# Altium PCB CAN Logger 3a HP3561 PCB.PcbDoc (part 1 of 2)
Units mil, origin at the board's own origin, x right, y up, seen from the top; angles counter-clockwise.
Board outline 2229 x 3254 mil, 4 copper layers (Component Side, Signal Layer 2, Signal Layer 1, Solder Side), stack 33.234 mil thick; 82 components, 94 nets, 403 pads, 304 vias.
Unrouted connection lines stored in the file: 3.
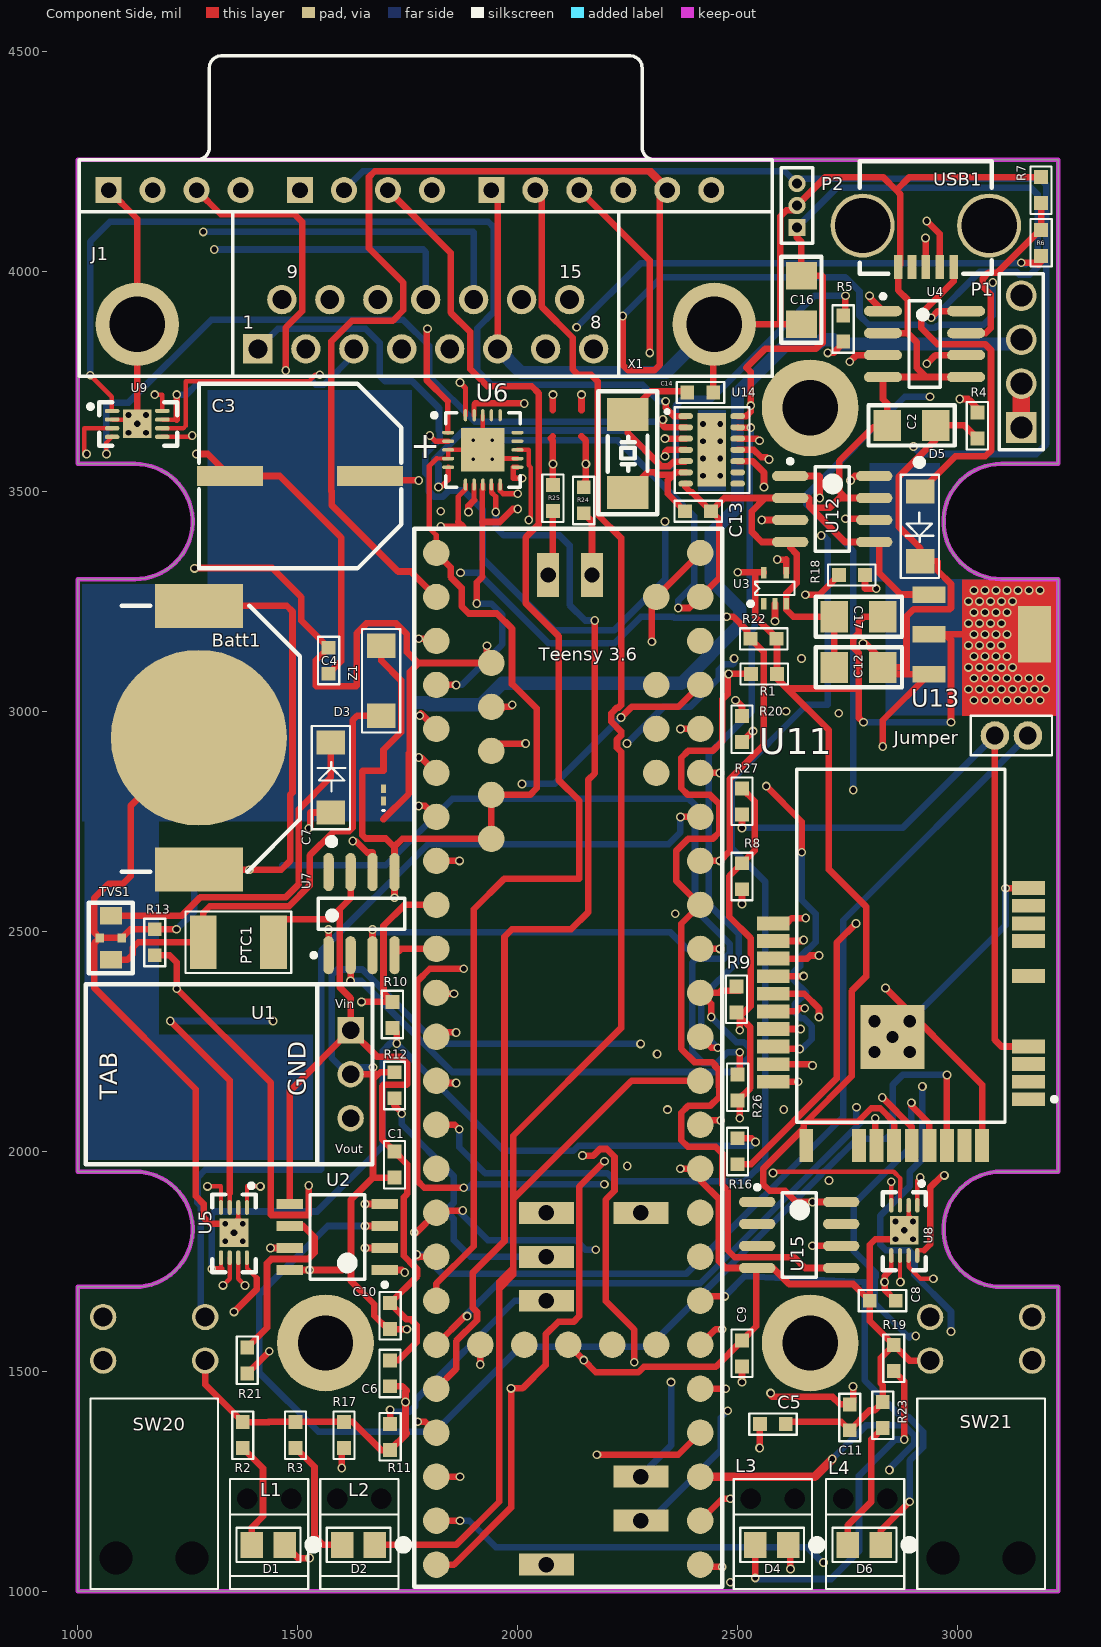
[diagram p0: Component Side view]
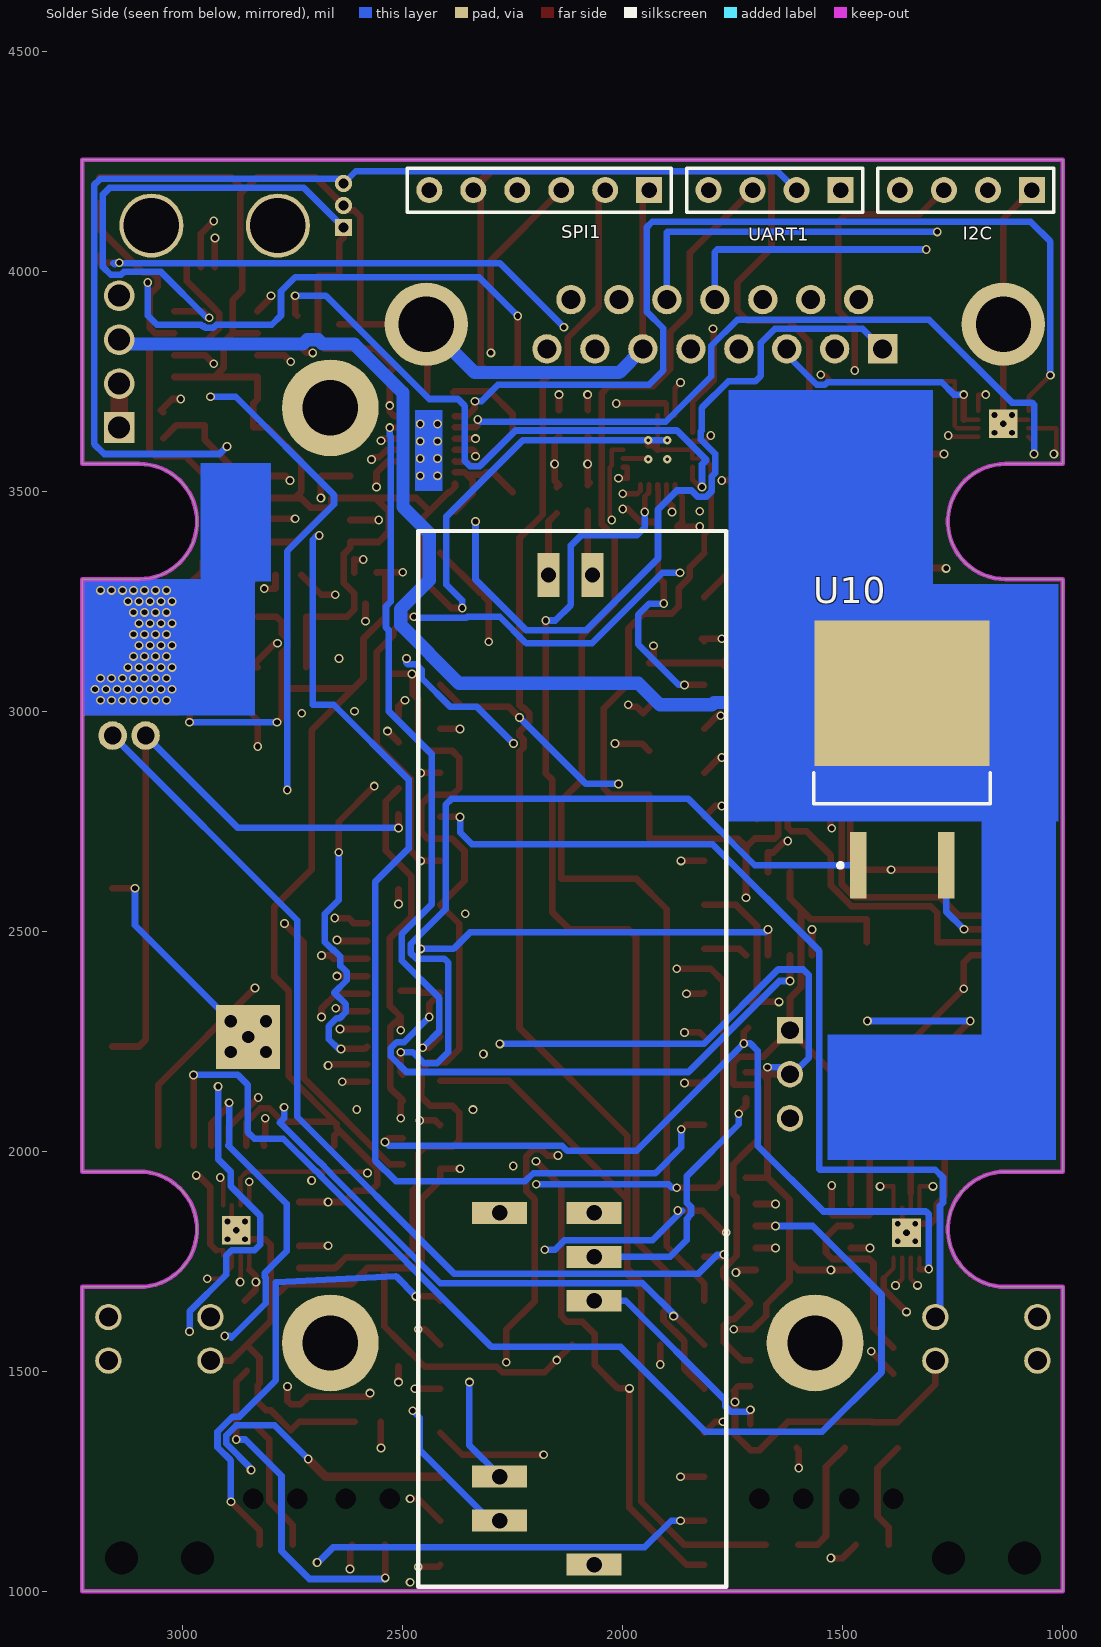
[diagram p1: Solder Side view, seen from below]
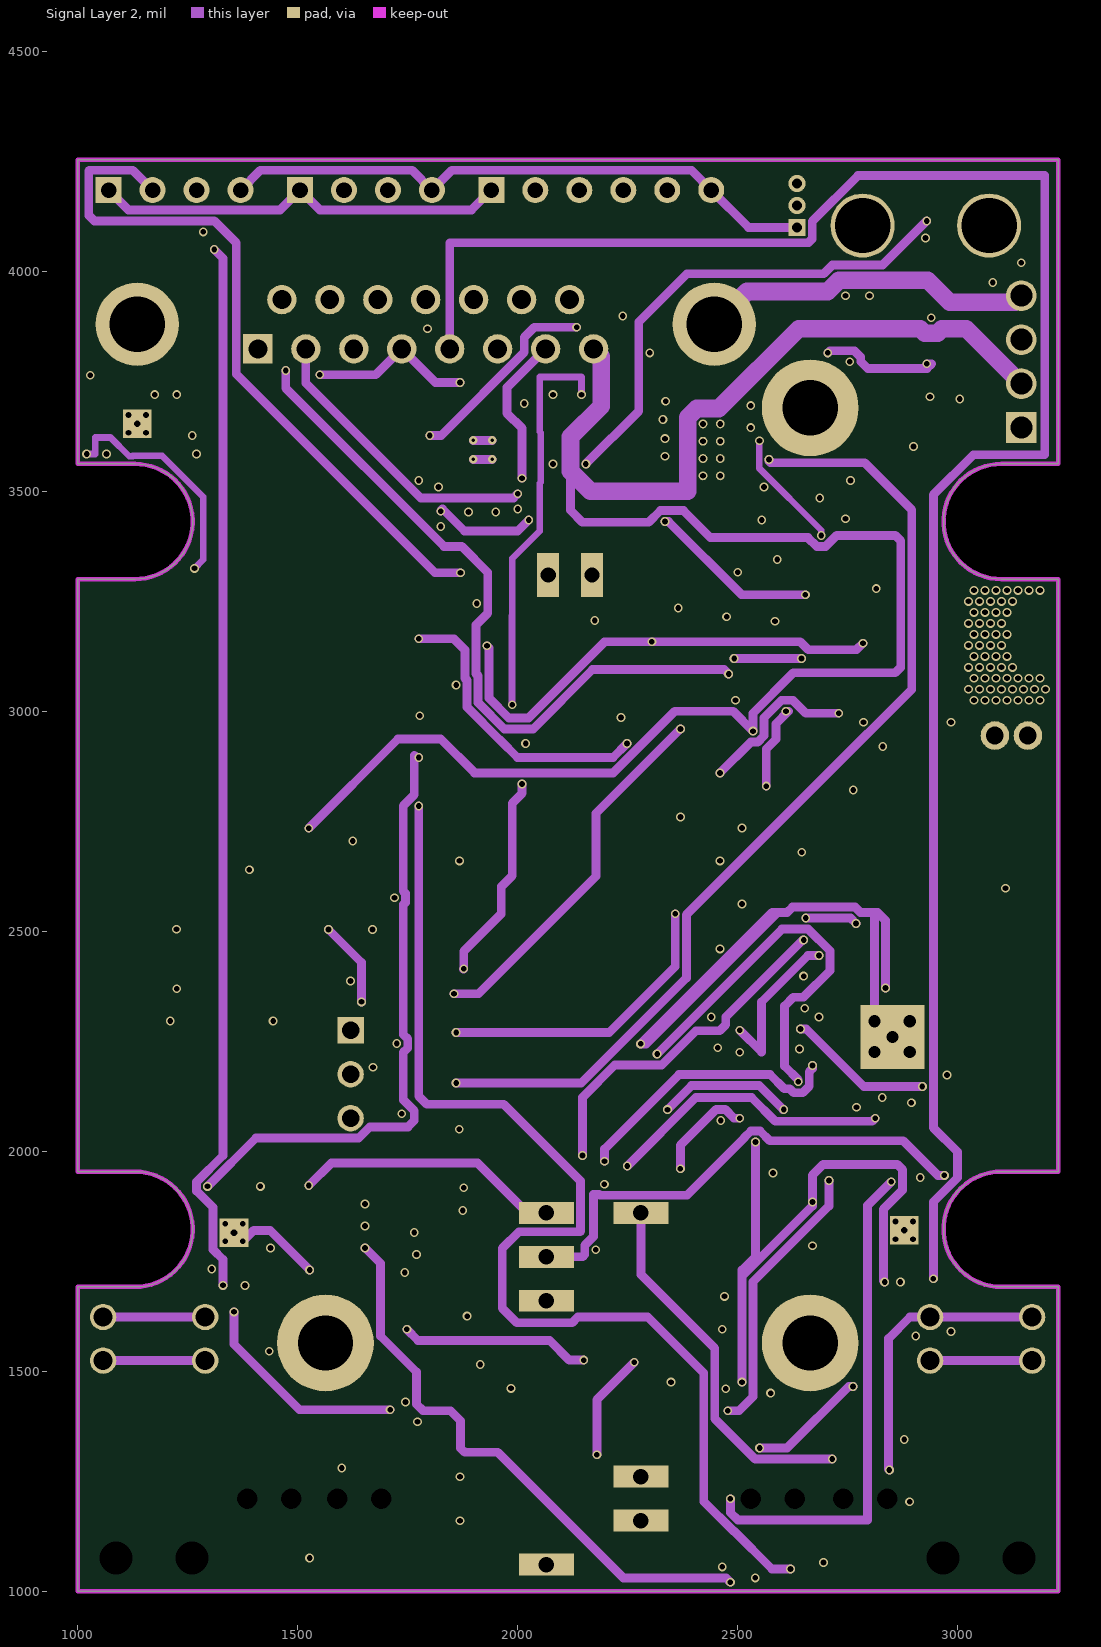
[diagram p2: Signal Layer 2]
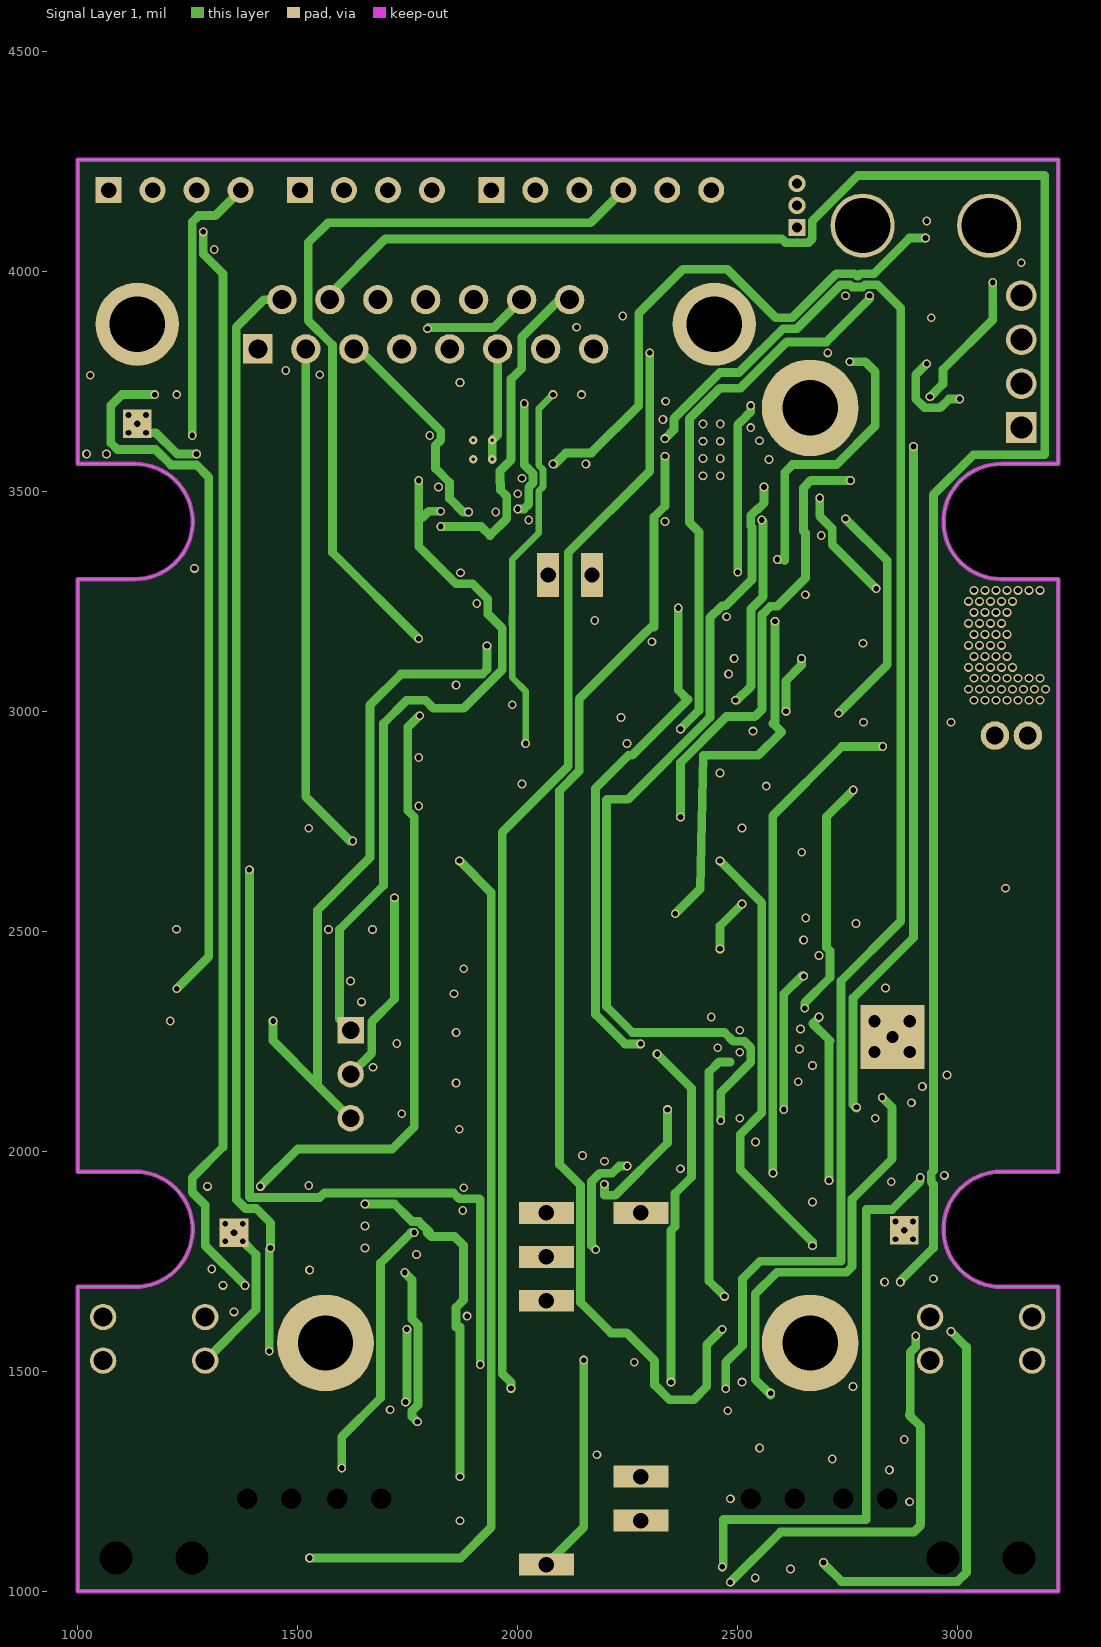
[diagram p3: Signal Layer 1]

## Layer stack, top to bottom
Top Solder: solder mask 0.4, Solder Resist, Dk 3.5
Component Side: signal copper 1.4
Dielectric 1: core 12.6, FR-4, Dk 4.8
Signal Layer 2: signal copper 1.417
Dielectric 5: prepreg 5, Dk 4.2
Signal Layer 1: signal copper 1.417
Dielectric 4: core 10, Dk 4.2
Solder Side: signal copper 1.4
Bottom Solder: solder mask 0.4, Solder Resist, Dk 3.5

## Board outline
1000,1000 1000,1691.5 1130,1691.5 ccw(c1130,1822.5) 1130,1953.5 1000,1953.5 1000,3300.5 1130,3300.5 ccw(c1130,3431.5) 1130,3562.5 1000,3562.5 1000,4254 3229,4254 3229,3562.5 3099,3562.5 ccw(c3099,3431.5) 3099,3300.5 3229,3300.5 3229,1953.5 3099,1953.5 ccw(c3099,1822.5) 3099,1691.5 3229,1691.5 3229,1000

## Design rules (kind name [scope] priority, off if disabled: settings)
Clearance [All] p1: gap=5 ignorepadtopadclearanceinfootprint=FALSE
DiffPairsRouting [All] p1: maxlimit=10 minlimit=10 mostfreqgap=10 toplayer_minwidth=15 toplayer_maxwidth=15 toplayer_prefwidth=15 midlayer1_minwidth=15 midlayer1_maxwidth=15 midlayer1_prefwidth=15 midlayer2_minwidth=15 midlayer2_maxwidth=15 midlayer2_prefwidth=15 bottomlayer_minwidth=15 bottomlayer_maxwidth=15 bottomlayer_prefwidth=15 maxuncoupledlength=500
HoleSize [All] p1: absolutevalues=TRUE maxlimit=250 minlimit=13 maxpercent=80.000 minpercent=20.000
MinimumSolderMaskSliver [All] p1: minsoldermaskwidth=1
PolygonConnect [All] p1: connectstyle=Relief reliefconductorwidth=10 reliefentries=4 polygonreliefangle="90 Angle" airgapwidth=10
RoutingVias [All] p1: holewidth=13 width=20 viastyle="Through Hole" minholewidth=13 minwidth=20 maxholewidth=28 maxwidth=50
SMDNeckDown [All] p1: percent=150.000
SilkToSilkClearance [All] p1: silktosilkclearance=1
SilkToSolderMaskClearance [IsPad] p1: minsilkscreentomaskgap=1 clearancetoexposedcopper=TRUE
SolderMaskExpansion [All] p1: expansion=4
Width [All] p1: maxlimit=100 minlimit=7 preferedwidth=20 toplayer_prefwidth=15 midlayer1_minwidth=10 midlayer2_minwidth=10 bottomlayer_minwidth=10 bottomlayer_prefwidth=15 minimp=50.000000 maximp=50.000000 favimp=50.000000
25 further rules are at their usual default settings.

## Classes and differential pairs
component class "Teensy 3.6 with J1939 - Handheld Rev3a": Batt1 C7 C9 C10 C13 C14 D1 D2 D4 D6 I2C L1 L2 L3 L4 P2 R2 R3 R8 R9 R10 R11 R12 R13 R18 R19 R20 R21 R23 SW20 SW21 "Teensy 3.6" U2 U5 U7 U8 U9 U12 U14 UART1 X1
component class "Additional Circuits - Handheld - Rev 3a": C1 C2 C3 C4 C5 C6 C8 C11 C12 C16 C17 D3 D5 J1 Jumper P1 PTC1 R1 R4 R5 R6 R7 R16 R17 R22 R24 R25 R26 R27 SPI1 TVS1 U1 U3 U4 U6 U10 U11 U13 U15 USB1 Z1
differential pair "USB D": +"USB D_P" -"USB D_N"

## Components (designator, comment, footprint, x,y, rotation, side; value= is the part's Value field where it differs from the comment)
Batt1 "CR1225" "Battery Clip - CR1225" 1275,2940 r270 top locked
C1 "0.1uF" 0603#1 1720,1969.53 r90 top
C2 "22uF" 1206 2895,3650 r0 top
C3 "100uF" "Elec. Cap - G" 1505,3535 r0 top locked
C4 "10uF" 0603#1 1570,3115 r270 top
C5 "10uF" 0603#1 2580,1379.53 r180 top
C6 "0.1uF" 0603#1 1710,1495 r90 top
C7 "10uF" 0603#2 1695,2810 r90 top
C8 "0.1uF" 0603#1 2830,1660 r0 top
C9 "0.1uF" 0603#1 2510,1540 r270 top
C10 "1uf" 0603#1 1710,1625 r270 top
C11 "0.1uF" 0603#1 2755,1395 r90 top
C12 "22uF" 1206 2775,3100 r0 top
C13 "18pF" 0603#1 2410,3455 r180 top
C14 "18pF" 0603#1 2415,3725 r180 top
C16 "22uF" 1206 2645,3935 r90 top
C17 "22uF" 1206 2775,3215 r0 top
D1 "Green" "0805 Polarized" 1435,1105 r180 top
D2 "Red" "0805 Polarized" 1640,1105 r180 top
D3 "ACURA107-HF" "SMA with A and K" 1575,2770 r90 top
D4 "Yellow" "0805 Polarized" 2580,1105 r180 top
D5 "ACURA107-HF" "SMA with A and K" 2915,3500 r270 top
D6 "Blue" "0805 Polarized" 2790,1105 r180 top
I2C "Header 4" HDR1X4#1 1070,4185 r0 bottom
J1 "Vehicle Interface Cable Connector" DSUB1.385-2H15 1790.91,4254.02 r0 top locked
Jumper "WiFi Jumper" "WiFi Jumper" 3160,2945 r180 top
L1 "SLP3" PCBComponent_1 1524,1255 r180 top locked
L2 "SLP3" PCBComponent_1 1729,1255 r180 top locked
L3 "SLP3" PCBComponent_1 2669,1255 r180 top locked
L4 "SLP3" PCBComponent_1 2879,1255 r180 top locked
P1 "Header 4" HDR1X4#2 3145,3645 r90 top
P2 "DNP GP-20U7 JST Header" MHDR1X3 2635,4100 r90 top
PTC1 "PTC RESTTBLE 0.75A" 1812 1365,2475 r0 top
R1 "4.7k" 0603#1 2560,3085 r180 top
R2 "330" 0603#1 1375,1354.53 r90 top
R3 "330" 0603#1 1495,1355 r90 top
R4 "4.7k" 0603#1 3045,3650 r90 top
R5 "47" 0603#1 2740,3870 r90 top
R6 "47" 0603#1 3190,4065 r270 top
R7 "4.7k" 0603#1 3190,4185 r90 top
R8 "100k" 0603#1 2510,2625 r90 top
R9 "100k" 0603#1 2497.5,2345 r270 top
R10 "4.7k" 0603#1 1715,2310 r270 top
R11 "100k" 0603#1 1710,1350 r270 top
R12 "100k" 0603#1 1720,2150 r90 top
R13 "100k" 0603#1 1175,2475 r90 top
R16 "100k" 0603#1 2500,2000 r90 top
R17 "100k" 0603#1 1605,1355 r90 top
R18 "4.7k" 0603#1 2760,3310 r0 top
R19 "330" 0603#1 2855,1530 r90 top
R20 "4.7k" 0603#1 2510,2959.53 r90 top
R21 "4.7k" 0603#1 1385,1524 r270 top
R22 "4.7k" 0603#1 2559,3165 r180 top
R23 "330" 0603#1 2830,1400 r90 top
R24 "47" 0603#1 2150,3480 r90 top
R25 "47" 0603#1 2080,3485 r90 top
R26 "100k" 0603#1 2500,2144.53 r270 top
R27 "100k" 0603#1 2510,2795 r270 top
SPI1 "Header 6" HDR1X6 1940,4185 r0 bottom
SW20 "PB400" PB400 1057.5,1623 r270 top locked
SW21 "PB400" PB400 2937.5,1623 r270 top locked
"Teensy 3.6" "Teensy 3.6" "Teensy 3.6 Surface Mount" 1815,2060 r0 top locked
TVS1 "Varistor 26V" Transfeed 1075,2535 r270 top
U1 "OKI-78SR" OKI-78SR 1620,2075 r90 top locked
U2 "NCV7356D1R2G" ONSC-SOIC-8-751-07_V 1590,1805 r180 top
U3 "74AHCT1G14" SOT-353 2585,3280 r0 top
U4 "SN75HVD08DR" SOIC-SN8_N 2925,3835 r0 top
U5 "MCP2558" TDFN 1355,1815 r180 top
U6 "ADG1634BCPZ-REEL7" ADI-CP-20-4_N 1920.63,3594.41 r0 top
U7 "MCP2003A-E/SN" SOIC-SN8_N 1645,2540 r90 top
U8 "MCP2558" TDFN 2878.89,1820 r180 top locked
U9 "MCP2558" TDFN 1135,3653.47 r270 top
U10 "DNP BTS141TC" INF-PG-TO263-3-2_N 1365,2890 r90 bottom
U11 "ATML-ATWINC1500-MR210PA-28" ATML-ATWINC1500-MR210PA-28_V 2871,2305.47 r180 top locked
U12 "MOCD207R2M" SOIC-8 2715,3460 r0 top
U13 "NCP1117LPST33" SOT-223 2934.84,3265.55 r270 top
U14 "MCP2517FD" SOP14 2381.89,3671.18 r0 top
U15 "ATECC608A" SOIC-8 2640,1809.53 r0 top
UART1 "Header 4" HDR1X4#1 1505,4185 r0 bottom
USB1 "UX60SC-MB-5S8" "USB Mini UX60S" 2927.99,4250.16 r180 top locked
X1 "16MHz" "XTAL 2 pad" 2250,3497.83 r90 top locked
Z1 "SMA6J" SMA 1690,3149 r270 top

## Footprints (in the part's own frame and the unit in brackets; to place one, negate y for a bottom-side part, rotate by r counter-clockwise, add the part's x,y. Pads: shape width x height; smd on the part's side, far side on the other; paste and mask are expansions set on the pad)
0603#1 [mm] "0603 SMP Component with outline"
  rect 0.8x0.8 smd: 1(-0.75,0) 2(0.75,0)
  silkscreen extent -1.39,-0.61 1.36,0.61
0603#2 [mm] "Chip Inductor, Body 0.6x0.3mm, IPC High Density"
  rect 0.5x0.3 smd: 1(-0.35,0) 2(0.35,0)
  silkscreen extent -0.9,-0.05 -0.9,0.05, body extent -0.33,-0.18 0.33,0.18, height 0.55
"0805 Polarized" [mm] "Polarized 0805 with Pin 1 as Anode (+)"
  rect 1.3x1.5 smd: 1(-0.899,0) 2(1.001,0)
  silkscreen extent -2.79,-0.99 1.88,0.99
1206 [mm]
  rect 1.6x1.8 smd: 1(-1.4,0) 2(1.4,0)
  silkscreen extent -2.47,-1.16 2.5,1.15
1812 [mil] "Used for PTC Fuses from belfuse"
  rect 60x122 smd: 1(-80,0)
  rect 62x122 smd: 2(80,0)
  silkscreen extent -120,-70 120,70
ADI-CP-20-4_N [mm] "QFN, 20-Leads, Body 4x4mm, Pitch 0.5mm, Thermal Pad 2.5x2.5mm, IPC Medium Density"
  oval 0.7x0.2 smd: 1(-2,1) 2(-2,0.5) 3(-2,0) 4(-2,-0.5) 5(-2,-1) 11(2,-1) 12(2,-0.5) 13(2,0) 14(2,0.5) 15(2,1)
  oval 0.2x0.7 smd: 6(-1,-2) 7(-0.5,-2) 8(0,-2) 9(0.5,-2) 10(1,-2) 16(1,2) 17(0.5,2) 18(0,2) 19(-0.5,2) 20(-1,2)
  rect 2.5x2.5 smd: 21(0,0)
  silkscreen extent -2.92,-2.15 2.15,2.15, body extent -2,-2 2,2, height 1
ATML-ATWINC1500-MR210PA-28_V [mm] "Module, 28-Leads, Body 21.72x14.73mm, Pitch 1.016mm"
  rect 1.9x0.8 smd: 1(-7.365,4.761) 2(-7.365,3.745) 3(-7.365,2.729) 4(-7.365,1.713) 5(-7.365,-2.351) 6(-7.365,-4.383) 7(-7.365,-5.399) 8(-7.365,-6.415) 9(-7.365,-7.431) 10(7.365,-5.393) 11(7.365,-4.377) 12(7.365,-3.361) 13(7.365,-2.345) 14(7.365,-1.329) 15(7.365,-0.313) 16(7.365,0.703) 17(7.365,1.719) 18(7.365,2.735) 19(7.365,3.751)
  rect 0.8x1.9 smd: 20(5.465,7.431) 21(2.417,7.431) 22(1.401,7.431) 23(0.385,7.431) 24(-0.631,7.431) 25(-1.647,7.431) 26(-2.663,7.431) 27(-3.679,7.431) 28(-4.695,7.431)
  rect 3.7x3.7 hole 0.711: 29(0.485,1.161)
  silkscreen extent -8.99,-14.29 6.01,6.08, body extent -7.36,-14.29 7.36,7.43, height 3.35
"Battery Clip - CR1225" [mil] "Battery Holder Outlline for CR2032"
  rect 100x200 smd: 1(-300,0) 1(300,0)
  round 400 smd: 2(0,0)
  silkscreen extent -300,-175 305,230
DSUB1.385-2H15 [mm] "Connector; D Subminiature; 15 Position; Right Angle; Pitch 1.385 mm"
  rect 1.69x1.69 hole 1.09: 1(-9.695,-10.92)
  round 1.69 hole 1.09: 2(-6.925,-10.92) 3(-4.155,-10.92) 4(-1.385,-10.92) 5(1.385,-10.92) 6(4.155,-10.92) 7(6.925,-10.92) 8(9.695,-10.92) 9(-8.31,-8.08) 10(-5.54,-8.08) 11(-2.77,-8.08) 12(0,-8.08) 13(2.77,-8.08) 14(5.54,-8.08) 15(8.31,-8.08)
  round 4.8 hole 3.18: 16(-16.66,-9.5) 17(16.66,-9.5)
  silkscreen extent -20,-12.5 20,6
"Elec. Cap - G" [mil] "Panasonic Style Electrolytic capacitor, Can size G, 10mm diameter"
  rect 150x45 smd: 1(159.45,0) 2(-159.45,0)
  silkscreen extent -229,-210 231,210
HDR1X4#1 [mm] "Connector; Header; 4 Position"
  rect 1.5x1.5 hole 0.9: 1(0,0)
  round 1.5 hole 0.9: 2(2.54,0) 3(5.08,0) 4(7.62,0)
  silkscreen extent -1.27,-1.27 8.89,1.27
HDR1X4#2 [mm] "Connector; Header; 4 Position"
  rect 1.778x1.778 hole 1.27: 1(0,0)
  round 1.778 hole 1.27: 2(2.54,0) 3(5.08,0) 4(7.62,0)
  silkscreen extent -1.27,-1.27 8.89,1.27
HDR1X6 [mm] "Connector; Header; 6 Position"
  rect 1.5x1.5 hole 0.9: 1(0,0)
  round 1.5 hole 0.9: 2(2.54,0) 3(5.08,0) 4(7.62,0) 5(10.16,0) 6(12.7,0)
  silkscreen extent -1.27,-1.27 13.97,1.27
INF-PG-TO263-3-2_N [mm] "DPAK, 3-Leads, Body 10x9.25mm, Pitch 2.54mm, IPC Medium Density"
  rect 3.85x0.95 smd: 1(-6.1,2.54) 3(-6.1,-2.54)
  rect 8.4x10.1 smd: 2(3.85,0)
  silkscreen extent -6.22,-5.1 -0.75,5.1, body extent -2.55,-5.1 6.9,5.1, height 4.4
MHDR1X3 [mm] "Connector; Header; 3 Position"
  rect 1x1 hole 0.6: 1(0,0)
  round 1 hole 0.6: 2(1.27,0) 3(2.54,0)
  silkscreen extent -0.9,-0.9 3.44,0.9
OKI-78SR [mil] "Horizontal Mount SIP DC/DC Converter"
  rect 60x60 hole 40: 1(200,0)
  round 60 hole 40: 2(100,0) 3(0,0)
  silkscreen extent -105,-50 305,602
ONSC-SOIC-8-751-07_V [mm] "SOIC, 8-Leads, Body 4.9x3.9mm, Pitch 1.27mm"
  rect 1.52x0.6 smd: 1(-2.74,1.905) 2(-2.74,0.635) 3(-2.74,-0.635) 4(-2.74,-1.905) 5(2.74,-1.905) 6(2.74,-0.635) 7(2.74,0.635) 8(2.74,1.905)
  silkscreen extent -2.87,-2.45 1.58,2.88, body extent -1.95,-2.45 1.95,2.45, height 1.75
PB400 [mil]
  round 60 hole 43: 1(0,0) 2(99,0) 3(0,232) 4(99,232)
  round 0 hole 75: ""(548,29.5) ""(548,202.5)
  silkscreen extent 185,-29 618,261
PCBComponent_1 [mil]
  round 0 hole 46: ""(39,45) ""(139,45)
  silkscreen extent 0,0 178,250
SMA [mil] "SMA with outline"
  rect 55x65 smd: 1(0,0) 2(159,0)
  silkscreen extent -38,-44 197,43
"SMA with A and K" [mil] "SMA with outline and Cathode Bar on Pin 2"
  rect 55x65 smd: 1(0,0) 2(159,0)
  silkscreen extent -71,-44 197,43
SOIC-8 [mm]
  oval 2.1x0.6 smd: 1(-2.425,1.905) 2(-2.425,0.635) 3(-2.425,-0.635) 4(-2.425,-1.905) 5(2.425,-1.905) 6(2.425,-0.635) 7(2.425,0.635) 8(2.425,1.905)
  silkscreen extent -2.55,-2.45 0.98,2.88
SOIC-SN8_N [mm] "SOIC, 8-Leads, Body 4.9x3.8mm, Pitch 1.27mm, IPC Medium Density"
  oval 2.2x0.6 smd: 1(-2.4,1.905) 2(-2.4,0.635) 3(-2.4,-0.635) 4(-2.4,-1.905) 5(2.4,-1.905) 6(2.4,-0.635) 7(2.4,0.635) 8(2.4,1.905)
  silkscreen extent -2.52,-2.5 0.9,2.88, body extent -2,-2.5 2,2.5, height 1.75
SOP14 [mm]
  oval 0.85x0.35 smd: 1(0,0) 2(0,-0.65) 3(0,-1.3) 4(0,-1.95) 5(0,-2.6) 6(0,-3.25) 7(0,-3.9) 8(3,-3.9) 9(3,-3.25) 10(3,-2.6) 11(3,-1.95) 12(3,-1.3) 13(3,-0.65) 14(3,0)
  round 0.508 hole 0.33: ""(1,-3.45) ""(1,-2.45) ""(1,-1.45) ""(1,-0.45) ""(2,-3.45) ""(2,-2.45) ""(2,-1.45) ""(2,-0.45)
  rect 1.65x4.25 smd: ""(1.5,-1.95)
  silkscreen extent -1.14,-4.44 3.68,0.51
SOT-223 [mm]
  rect 0.95x1.9 smd: 1(0,0) 2(2.3,0) 3(4.6,0)
  rect 3.25x1.9 smd: 4(2.3,6.1)
SOT-353 [mil]
  rect 12x26 smd: 1(-25.59,-35.43) 2(0,-35.43) 3(25.59,-35.43) 4(25.59,35.43) 6(-25.59,35.43)
  silkscreen extent -61,-40 44,15
TDFN [mm] "8-Lead Plastic Dual Flat, No Lead Package (MN) – 2x3x0.75mm Body [TDFN]"
  rect 1.651x1.651 hole 0.381: 0(0,0)
  oval 0.25x0.85 smd: 1(-0.75,-1.45) 2(-0.25,-1.45) 3(0.25,-1.45) 4(0.75,-1.45) 5(0.75,1.45) 6(0.25,1.45) 7(-0.25,1.45) 8(-0.75,1.45)
  silkscreen extent -1.25,-2.83 1.25,2.3
"Teensy 3.6 Surface Mount" [mil] "32 bit Arduino Compatible Microcontroller www.pjrc.com/teensy"
  round 60 smd: 1(0,0) 2(0,100) 3(0,200) 4(0,300) 5(0,400) 6(0,500) 7(0,600) 8(0,700) 9(0,800) 10(0,900) 11(0,1000) 12(0,1100) 13(0,1200) 14(0,1300) 15(100,-500) 16(0,-100) 17(300,-500) 18(400,-500) 19(600,-300) 20(600,0) 21(600,100) 22(600,200) 23(600,300) 24(600,400) 25(600,500) 26(600,600) 27(600,700) 28(600,800) 29(600,900) 30(600,1000) 31(600,1100) 32(600,1200) 33(600,1300) 34(500,1200) 35(500,1000) 36(500,900) 37(500,800) 38(0,-200) 39(0,-300) 40(0,-400) 41(0,-500) 42(0,-600) 43(0,-700) 44(0,-800) 45(0,-900) 46(0,-1000) 47(600,-1000) 48(600,-900) 49(600,-600) 50(600,-500) 51(600,-400) 61(600,-200) 62(600,-800) 63(600,-700) 75(125,1050) 76(125,950) 77(125,850) 78(125,750) 79(125,650) 88(500,-500) 90(600,-100) 91(200,-500)
  rect 125x50 hole 35: 52(250,-200) 53(250,-300) 54(250,-400) 59(250,-1000) 68(465,-200) 72(465,-800) 74(465,-900)
  rect 50x100 hole 35: 82(354,1250)
  rect 50x100 hole 35 paste+10: 83(254,1250)
  silkscreen extent -50,-1050 650,1355
Transfeed [mil] "AVX Multilayer Ceramic Transient Voltage Suppressors"
  rect 40x50 smd: 1(0,0) 2(100,0)
  rect 20x20 smd: 3(50,25) 3(50,-25)
  silkscreen extent -30,-50 130,50
"USB Mini UX60S" [mm] "Receptacle - Standard - Shell through Hole"
  round 3.7 hole 3.2: 0(-3.65,3.7) 0(3.65,3.7)
  rect 0.5x1.4 smd: 1(-1.6,6.1) 2(-0.8,6.1) 3(0,6.1) 4(1.6,6.1) 5(0.8,6.1)
  silkscreen extent -3.81,0 3.81,6.48
"WiFi Jumper" [mil]
  round 65 hole 40: 1(0,0) 2(75,0)
  silkscreen extent -55,-45 130,45
"XTAL 2 pad" [mm] "Digikey XC1659CT-ND"
  rect 1.9x2.4 smd: 1(0,0) 2(4.5,0)
  silkscreen extent -1.27,-1.7 5.84,1.7

## Part data
Batt1: library part "CR2032 Battery Holder", "Lithium Battery Non-Rechargeable (Primary) 3V Coin, 12.5mm", Manufacturer=Linx, PartNumber=BAT-HLD-012-SMT, Supplier Part Number 1=BAT-HLD-012-SMT-ND, Supplier 1=Digi-Key
C1 C9 C11: library part Cap, "CAP CER 0.1UF 50V X7R 0603", Manufacturer=KEMET, PartNumber=C0603C104K5RACAUTO, Supplier Part Number 1=399-6856-1-ND, Supplier 1=Digi-Key
C2 C12 C16 C17: library part Cap, "22µF ±20% 25V Ceramic Capacitor X5R 1206 (3216 Metric)", Manufacturer="Murata Electronics North America", PartNumber=GRT31CR61E226ME01L, Supplier Part Number 1=490-12451-1-ND, Supplier 1=Digi-Key
C3: library part "Tantalum Cap_1", "Aluminum Electrolytic Capacitors Radial, Can - SMD 5000 Hrs @ 105°C", Manufacturer="Panasonic Electronic Components", PartNumber=EEE-HC1H101P, Supplier Part Number 1=P19732CT-ND, Supplier 1=Digi-Key
C4 C5 C7: library part Cap, "10µF ±20% 25V Ceramic Capacitor X5R 0603 (1608 Metric)", Manufacturer="Murata Electronics North America", PartNumber=ZRB18AR61E106ME01L, Supplier Part Number 1=490-10991-1-ND, Supplier 1=Digi-Key
C6 C8: library part Cap, "CAP CER 0.1UF 50V 10% X7R 0603", Manufacturer=KEMET, PartNumber=C0603C104K5RACAUTO, Supplier Part Number 1=399-6856-1-ND, Supplier 1=Digi-Key
C10: library part Cap, "1µF ±20% 50V Ceramic Capacitor X5R 0603 (1608 Metric)", Manufacturer="Murata Electronics North America", PartNumber=GRT188R61H105ME13D, Supplier Part Number 1=490-12331-1-ND, Supplier 1=Digi-Key
C13 C14: library part Cap, "18pF ±5% 50V Ceramic Capacitor C0G, NP0 0603 (1608 Metric)", Manufacturer=Kemet, PartNumber=C0603C180J5GACAUTO, Supplier Part Number 1=399-16019-1-ND, Supplier 1=Digi-Key
D1: library part "LED - SMD", "Green 570nm LED Indication - Discrete 2.2V 0805 (2012 Metric)", Manufacturer="OSRAM Opto Semiconductors Inc.", PartNumber="LG R971-KN-1", Supplier Part Number 1=475-1410-1-ND, Supplier 1=Digi-Key
D2: library part "LED - SMD", "Red 633nm LED Indication - Discrete 2V 0805 (2012 Metric)", Manufacturer="OSRAM Opto Semiconductors Inc.", PartNumber="LS R976-NR-1", Supplier Part Number 1=475-1278-1-ND, Supplier 1=Digi-Key
D3 D5: library part "Schottky Diode", "Diode Schottky 1000V 1A Surface Mount DO-214AC (SMA)", Manufacturer="Comchip Technology", Supplier Part Number 1=641-1884-1-ND, PartNumber=ACURA107-HF, Supplier 1=Digi-Key
D4: library part "LED - SMD", "LED YELLOW DIFFUSED 0805 SMD", Manufacturer="OSRAM Opto Semiconductors Inc.", PartNumber="LY R976-PS-36", Supplier Part Number 1=475-2560-1-ND, Supplier 1=Digi-Key
D6: library part "LED - SMD", "Blue 470nm LED Indication - Discrete 3.3V 0805 (2012 Metric)", Manufacturer="Broadcom Limited", PartNumber=HSMN-C170, Supplier Part Number 1=516-1437-1-ND, Supplier 1=Digi-Key
I2C P1 UART1: "Header, 4-Pin"
J1: library part "D Connector 15", "Receptacle Assembly, 15 Position, Right Angle", Manufacturer="Amphenol FCI", PartNumber=D15S33E4GV00LF, Supplier Part Number 1=609-1498-ND, Supplier 1=Digi-Key
L1 L2 L3 L4: Manufacturer="Bivar Inc.", PartNumber=SLP3-150-250-R, Supplier Part Number 1=492-2517-ND, Supplier 1=Digi-Key
P2: library part MHDR1X3, "CONN HEADER PH SIDE 3POS 2MM SMD", Manufacturer=JST, PartNumber=S3B-PH-SM4-TB(LF)(SN), Supplier Part Number 1=455-1750-1-ND, Supplier 1=Digi-Key
PTC1: library part PTC, "PTC RESTTBLE 0.75A 33V CHIP 1812", Manufacturer="Bel Fuse Inc.", PartNumber=0ZCG0075BF2B, Supplier Part Number 1=507-1765-1-ND, Supplier 1=Digi-Key
R1 R4 R7 R10 R18 R20 R21 R22: library part "Chip Resistor", "±1% 0.1W, 1/10W Chip Resistor 0603 (1608 Metric) Automotive AEC-Q200, High Voltage Thick Film", Manufacturer="Rohm Semiconductor", PartNumber=KTR03EZPF4701, Supplier Part Number 1=RHM4.7KAYCT-ND, Supplier 1=Digi-Key
R2 R3 R19 R23: library part "Chip Resistor", "330 Ohms ±1% 0.1W, 1/10W Chip Resistor 0603 (1608 Metric) Automotive AEC-Q200, High Voltage Thick Film", Manufacturer="Rohm Semiconductor", PartNumber=KTR03EZPF3300, Supplier Part Number 1=RHM330AYCT-ND, Supplier 1=Digi-Key
R5 R6 R24 R25: library part "Chip Resistor", "±1% 0.1W, 1/10W Chip Resistor 0603 (1608 Metric) Automotive AEC-Q200, High Voltage Thick Film", Manufacturer="Rohm Semiconductor", PartNumber=KTR03EZPF47R0, Supplier Part Number 1=RHM47AYCT-ND, Supplier 1=Digi-Key
R8 R9 R11 R12 R13 R16 R17 R26 R27: library part "Chip Resistor", "±1% 0.1W, 1/10W Chip Resistor 0603 (1608 Metric) Automotive AEC-Q200, High Voltage Thick Film", Manufacturer="Rohm Semiconductor", PartNumber=KTR03EZPF1003, Supplier Part Number 1=RHM100KAYCT-ND, Supplier 1=Digi-Key
SPI1: "Header, 6-Pin"
SW20 SW21: "Pushbutton Switch DPST-NO Standard Through Hole, Right Angle", Manufacturer=E-Switch, PartNumber=PB400OAQR1BLK, Supplier Part Number 1=EG5548-ND, Supplier 1=Digi-Key
"Teensy 3.6": "K66 Teensy 3.6 Kinetis MCU 32-Bit ARM® Cortex®-M4 Embedded Evaluation Board", Manufacturer=PRJC, Supplier Part Number 1=1568-1442-ND, PartNumber="Teensy 3.6", Supplier 1=Digi-Key
TVS1: library part Transfeed, "34.5V 80A Varistor 1 Circuit Surface Mount 0805 (2012 Metric)", Manufacturer=AVX, PartNumber=V2AF126C600Y2EDP, Supplier Part Number 1=478-10038-1-ND, Supplier 1=Digi-Key
U1: library part 7805, "5V DC/DC Converter (7805 replacement)", Manufacturer="Murata Power Solutions Inc.", PartNumber=OKI-78SR-5/1.5-W36H-C, Supplier Part Number 1=811-2692-ND, Supplier 1=Digi-Key
U2: library part NCV7356D1G, "Single Wire CAN Transceiver, 5 to 27 V, 8-Pin SOIC, Pb-Free, Tube", Manufacturer="On Semiconductor", Supplier Part Number 1=NCV7356D1R2GOSCT-ND, PartNumber=NCV7356D1R2G, Supplier 1=Digi-Key
U3: library part "74AHCT1G14 Inverter", "IC SCHMIT-TRIGG INV GATE SOT353", Manufacturer="Diodes Incorporated", PartNumber=74AHCT1G14SE-7, Supplier Part Number 1=74AHCT1G14SE-7DICT-ND, Supplier 1=Digi-Key
U4: library part "SN75HVD12D (3.3v RS485)", "IC RS485 TXRX 3/5V 8-SOIC", Manufacturer="Texas Instruments", Supplier Part Number 1=296-37893-1-ND, PartNumber=SN75HVD08DR, Supplier 1=Digi-Key
U5: library part MCP2558FD, "Microchip CAN FD Transceiver with Silent Mode", Manufacturer="Microchip Technology", PartNumber=MCP2558FDT-H/MNY, Supplier Part Number 1=MCP2558FDT-H/MNYCT-ND, Supplier 1=Digi-Key
U6: "IC SWITCH QUAD SPDT 20LFCSP", Manufacturer="Analog Devices", Supplier Part Number 1=ADG1634BCPZ-REEL7CT-ND, PartNumber=ADG1634BCPZ-REEL7, Supplier 1=Digi-Key
U7: library part MCP2003AT-E/SN, "LIN J2602 Transceiver, 8-Pin SOIC, Extended Temperature, Tape and Reel", Manufacturer="Microchip Technology", Supplier Part Number 1=MCP2003A-E/SN-ND, PartNumber=MCP2003A-E/SN, Supplier 1=Digi-Key
U8 U9: library part MCP2558FD, "Microchip CAN FD Transceiver with Silent Mode", Manufacturer=Microchip, PartNumber=MCP2558FDT-H/MNY, Supplier Part Number 1=MCP2558FDT-H/MNYCT-ND, Supplier 1=Digi-Key
U10: library part BTS141TC, "Smart Low-Side Power Switch HITFET, 60 V VDS, 12 A ID, -40 to 150 degC, PG-TO263-3-2, Reel, Green", Manufacturer=Infineon, PartNumber=BTS141TCBUMA1, Supplier Part Number 1=BTS141TCBUMA1CT-ND, Supplier 1=Digi-Key
U11: "SMARTCONNECT ATWINC1500B-MU-T MO", Manufacturer="Microchip Technologies", PartNumber=ATWINC1510-MR210PB1140, Supplier Part Number 1=ATWINC1510-MR210PB1140-ND, Supplier 1=Digi-Key
U12: library part "Optoisolator - Dual", "Optoisolator Transistor Output 2500Vrms 2 Channel 8-SO Tall", Manufacturer="Fairchild/ON Semiconductor", Supplier Part Number 1=MOCD207R2MCT-ND, PartNumber=MOCD207R2M, Supplier 1=Digi-Key
U13: library part "NCP1117 2.5V", "Linear Voltage Regulator IC Positive Fixed Output 3.3V 1A SOT-223", Manufacturer="On Semiconductor", PartNumber=NCP1117LPST33T3G, Supplier Part Number 1=NCP1117LPST33T3GOSCT-ND, Supplier 1=Digi-Key
U14: "CANbus Controller CAN 2.0 SPI Interface 14-VDFN (4.5x3)", Manufacturer="Microchip Technology", PartNumber=MCP2517FDT-H/JHA, Supplier Part Number 1=MCP2517FDT-H/JHACT-ND, Supplier 1=Digi-Key
U15: library part ATECC508A, "Authentication Chip IC Networking and Communications 8-SOIC", Manufacturer="Microchip Technology", PartNumber=ATECC608A-SSHCZ-T, Supplier Part Number 1=ATECC608A-SSHCZ-TCT-ND, Supplier 1=Digi-Key
USB1: library part USB-Rugged, "USB - mini B USB 2.0 Receptacle Connector 5 Position Surface Mount, Right Angle; Through Hole", Manufacturer=Hirose, Supplier Part Number 1=H11589CT-ND, PartNumber=UX60SC-MB-5S8, Supplier 1=Digi-Key
X1: library part "Crystal Oscillator", "CRYSTAL 16MHZ 18PF SMD", Manufacturer="TXC CORPORATION", PartNumber=7A-16.000MAAJ-T, Supplier Part Number 1=887-1086-1-ND, Supplier 1=Digi-Key
Z1: library part "Zener - Bidirectional", "TVS DIODE 20VWM 36.8VC SMA", Manufacturer="Micro Commercial Co", PartNumber=SMA6J24CA-TP, Supplier Part Number 1=SMA6J24CA-TPMSCT-ND, Supplier 1=Digi-Key

## Free pads (board coordinates)
  round 220 hole 126: 0(1563,1564) 0(2665,1564) 0(2665,3690)

## Via types
v1: diameter 20, hole 13, Component Side to Solder Side, 296 vias
v2: diameter 19.68, hole 7.87, Component Side to Solder Side, 4 vias
v3: diameter 50, hole 28, Component Side to Solder Side, 4 vias

## Nets (pads, with @x,y where several pads share a name; then routed paths per layer and width w, separated by ;. In a path a pad name is that pad's centre, name@x,y a point inside that pad or via, vN(x,y) a via of type N, cw(c..) or ccw(c..) an arc to the next point about the centre after c; other vN are vias at no path point)
3V3: C8.2 C9.2 C16.2 C17.2 I2C.4 P2.1 R1.1 R10.2 R16.2 R22.1 SPI1.6 U3.6 U4.8 U5.5 U8.5 U9.5 U11.20 U11.23 U13.2 U13.4 U14.14 U15.8 UART1.4 | length 10904.5
  Component Side w10: U9.5@1192.09,3623.94 v1@1257,3623.94 ; 1325.47,1733 U5.5@1325.47,1757.91 ; 2849.36,1731 U8.5@2849.36,1762.91
  Component Side w14.76: v1(1304.25,1732) 1324.47,1732 1325.47,1733 ; 2847,1728.64 2849.36,1731
  Component Side w15: v1@1257,3623.94 v1(1260,3626.94) ; R10.2@1715,2280.47 1725,2270.47 v1(1725,2245) ; R16.2@2500,2029.53 2532.07,2029.53 v1(2540.6,2021) ; U14.14@2500,3671.18 2520,3671.18 2530,3681.18 v1(2530,3695) 2530,3771.5 2520,3781.5 2562.5,3824 2677.18,3824 2690.68,3837.5 2693,3837.5 2693,3989.12 2692,3990.12 C16.2@2645,3990.12 2645,4067.15 2635,4077.15 P2.1@2635,4100 ; v1(2500.18,3316) 2541,3316 ; v1(2510,1475) C9.2@2510,1510.47 ; U3.6@2559.41,3315.43 2559.41,3316 2541,3316 ; U11.20@2649.98,2041.71 2655.84,2035.85 U11.20@2655.84,2012.91 ; U15.8@2735.47,1884.53 v1(2670,1884.53) 2633.47,1884.53 2608,1910 2573,1910 2558,1925 2558,1959.82 2649.98,2051.8 2649.98,2061.14 2655.84,2067 ; v1(2786,2975) 2775,2986 2775,3052 ; C17.2@2830.12,3215 2787.5,3215 2775,3202.5 2775,3176.82 2762.5,3164.32 2762.5,3145.68 2775,3133.18 2775,3052 ; 2847,1728.64 2834.2,1715.83 v1(2834.2,1702.81) 2834.2,1685.33 C8.2@2859.53,1660 ; U11.23@2855.84,2012.91 2855.84,2066 2824.34,2097.5 2803.65,2097.5 2773.15,2067 2655.84,2067 ; U13.2@2934.84,3175 2972.5,3175 ; v1(2940,3895) 2955,3910 U4.8@3019.49,3910 ; v1(2985,2975) 2985,3162.5 2972.5,3175 ; U13.4@3175,3175 2972.5,3175 ; 2541,3316 2540,3315 2540,3214.82 2589.53,3165.29 R1.1@2589.53,3085 2589.53,3074.97 2612.5,3052 ; 2612.5,3052 2707.5,2957 2707.5,2640.5 2792,2556 2792,2396.86 2759.07,2363.93 2759.07,2170.23 2655.84,2067 ; 2612.5,3052 2775,3052
  Signal Layer 2 w20: I2C.4@1370,4185 1415,4230 1760,4230 UART1.4@1805,4185 1850,4230 2395,4230 SPI1.6@2440,4185 2525,4100 P2.1@2635,4100 ; v1(2510,1475) 2510,1715.39 ; v1(2540.6,2021) 2540.6,1760.6 2510,1730 2510,1715.39 ; v1(2834.2,1702.81) 2831.39,1705.61 2831.39,1867.61 2831,1868 2875,1912 2875,1957.5 2862.5,1970 2695,1970 2670,1945 v1(2670,1884.53) 2670,1875.39 2510,1715.39
  Signal Layer 1 w20: v1(1260,3626.94) 1260,4112.5 1274.5,4127 1312,4127 I2C.4@1370,4185 ; v1(2500.18,3316) 2500.18,3651.18 2520.18,3671.18 2520,3671.36 2530,3681.36 v1(2530,3695)
  Solder Side w15: v1(1304.25,1732) 1304.25,1856.25 1311,1863 1544,1863 1693.5,2012.5 1693.5,2228.5 1710,2245 v1(1725,2245) 1968.97,2001.03 2126.71,2001.03 2138.18,2012.5 2532.1,2012.5 v1(2540.6,2021) ; P2.1@2635,4100 2725,4190 3167,4190 3182,4175 3182,4010.18 3164.32,3992.5 3140.68,3992.5 3134.18,3999 3050,3999 2946,3895 v1(2940,3895) ; v1(2786,2975) v1(2985,2975)
  other v1: 3037.5,3025 3062.5,3025 3087.5,3025 3112.5,3025 3137.5,3025 3162.5,3025 3187.5,3025 3025,3050 3050,3050 3075,3050 3100,3050 3125,3050 3150,3050 3175,3050 3200,3050 3037.5,3075 3062.5,3075 3087.5,3075 3112.5,3075 3137.5,3075 3162.5,3075 3187.5,3075 3025,3100 3050,3100 3075,3100 3100,3100 3125,3100 3037.5,3125 3062.5,3125 3087.5,3125 3112.5,3125 3025,3150 3050,3150 3075,3150 3100,3150 3037.5,3175 3062.5,3175 3087.5,3175 3112.5,3175 3025,3200 3050,3200 3075,3200 3100,3200 3037.5,3225 3062.5,3225 3087.5,3225 3112.5,3225 3025,3250 3050,3250 3075,3250 3100,3250 3125,3250 3037.5,3275 3062.5,3275 3087.5,3275 3112.5,3275 3137.5,3275 3162.5,3275 3187.5,3275
5V0: "Teensy 3.6.33" "Teensy 3.6.34" "Teensy 3.6.75" C2.2 C4.1 C7.1 C12.2 D5.2 R4.1 U1.3 U5.3 U8.3 U9.3 U13.3 | length 8613.5
  Component Side w10: v1(1020,3585) 1015,3585 1015,3643.62 U9.3@1077.91,3643.62 ; U5.3@1345.16,1872.09 1345.16,1904.09 ; v1(2580.64,1950.64) 2583.5,1953.5 2854.78,1953.5 2869.36,1938.92 2869.36,1915.31 2869.05,1915 U8.3@2869.05,1877.09
  Component Side w15: v1(1210,2296) 1345.16,2160.84 1345.16,1904.09 ; v1(1265,3325) 1265.91,3325.91 1441.91,3325.91 1508,3259.82 1508,3206.53 C4.1@1570,3144.53 1541,3115.53 1541,3058 1542,3057 1633,3057 1634,3058 1634,3177.75 1656.25,3200 1723.32,3200 1748,3175.32 1748,3135 1773,3110 1775,3110 ; 1695,2754.88 1752.5,2812.38 1752.5,2904.32 1755,2906.82 1755,3090 1775,3110 ; v1(1930,3149) 1930,3120 1940,3110 1775,3110 ; v1(2305,3158) 2305,3250 2315,3260 2305,3270 2325,3270 2415,3360 ; v1(2785,3155) 2791,3155 C12.2@2846,3100 ; v1(2830,2920) 2830,2979.61 U13.3@2934.84,3084.45 2889.55,3084.45 ; C12.2@2830.12,3100 C12.2@2846,3100 ; R4.1@3045,3620.47 3015.47,3650 C2.2@2950.12,3650 2950.12,3617 2866,3532.88 2866,3420 2915,3371 D5.2@2915,3341 2954,3341 2955,3340 2955,3319.5 2985,3289.5 2985,3235 2982,3232 2900,3232 2884,3216 2884,3090 ; C12.2@2846,3100 2874,3100 2884,3090 ; C12.2@2846,3100 2861.55,3084.45 2885,3084.45 ; 2884,3090 2884,3085.45 2885,3084.45 ; 2884,3090 2889.55,3084.45 ; 2885,3084.45 2889.55,3084.45
  Signal Layer 2 w15: v1(1020,3585) 1040,3585 1040,3622.5 1074.32,3622.5 1116.82,3580 1124.19,3580 1124.91,3580.72 1191.81,3580.72 1285,3487.53 1285,3345 v1(1265,3325)
  Signal Layer 2 w20: v1(1930,3149) 1935,3144 1935,3030 1980.36,2984.64 2024.29,2984.64 2197.64,3158 v1(2305,3158) 2642.36,3158 2660.36,3140 2770,3140 v1(2785,3155)
  Signal Layer 1 w20: v1(1444,2296) 1444,2251 1545,2150 ; U1.3@1620,2075 1545,2150 ; v1(1930,3149) 1930,3095 1920,3085 1735,3085 1664,3014 1664,2667 1545,2548 1545,2150 ; v1(2580.64,1950.64) 2580,1951.28 2580,2762.84 2737.16,2920 v1(2830,2920)
  Solder Side w15: v1(1210,2296) v1(1444,2296)
A6: J1.1 R18.1 | length 2164.1
  Component Side w15: v1(2654,3265) 2685.47,3265 R18.1@2730.47,3310
  Signal Layer 2 w20: v1(2335,3431.5) 2342.5,3431.5 2509,3265 v1(2654,3265)
  Solder Side w15: J1.1@1409.21,3824.09 1455.12,3870 1654,3870 1686.5,3837.5 1686.5,3762.5 1699,3750 1760.5,3750 1821,3689.5 1821,3637.76 1822.5,3636.26 1822.5,3617.62 1790,3585.12 1790,3541.82 1797.5,3534.32 1797.5,3500.68 1810.68,3487.5 1829.32,3487.5 1843.85,3502.03 1876.95,3502.03 1920,3458.98 1920,3347.49 2083.47,3184.03 2219.03,3184.03 2335,3300 v1(2335,3431.5)
A7: J1.11
CAN0H: J1.13 U5.7 | length 3330.3
  Component Side w10: U5.7@1364.84,1757.91 1364.84,1710 v1(1380,1694.84)
  Signal Layer 1 w20: v1(1285,4090) 1285,4039.64 1330,3994.64 1330,2009.64 1260,1939.64 1260,1907 1289.5,1877.5 1289.5,1785.34 v1(1380,1694.84)
  Solder Side w15: v1(1285,4090) 1898.98,4090 1899.96,4089.02 J1.13@1899.96,3935.91
CAN0L: J1.12 U5.6 | length 3074
  Component Side w10: v1(1330,1695) 1330,1694.84 1330.08,1694.92 1345.16,1710 U5.6@1345.16,1757.91
  Signal Layer 2 w20: v1(1310,4050) 1330,4030 1330,1990.36 1270,1930.36 1270,1909.64 1307.5,1872.14 1307.5,1776.29 1330,1753.79 v1(1330,1695)
  Solder Side w15: v1(1310,4050) 1785,4050 1790.91,4044.09 J1.12@1790.91,3935.91
CAN0RX: "Teensy 3.6.9" U5.4 | length 1540.4
  Component Side w10: v1(1295,1920) 1325.47,1920 U5.4@1325.47,1872.09
  Component Side w15: v1(1775,2895) 1780,2895 1815,2860
  Signal Layer 2 w20: v1(1295,1920) 1405,2030 1638.64,2030 1663.64,2055 1750.36,2055 1765,2069.64 1765,2091.73 1740,2116.73 1740,2224.64 1750,2234.64 1750,2255.36 1740,2265.36 1740,2560.64 1745,2565.64 1745,2586.36 1740,2591.36 1740,2785.36 1765,2810.36 1765,2900 1770,2895 v1(1775,2895)
CAN0TX: "Teensy 3.6.10" U5.1 | length 1493.4
  Component Side w10: U5.1@1384.53,1872.09 1384.53,1920 v1(1415,1920)
  Component Side w15: v1(1777.5,2990) 1777.5,2992.5 1780,2995 1815,2960
  Signal Layer 1 w20: v1(1415,1920) 1500,2005 1715,2005 1765,2055 1765,2759.64 1750,2774.64 1750,2964.09 1775.91,2990 v1(1777.5,2990)
"CAN1 Switch": "Teensy 3.6.11" U6.8 U6.19 | length 1106.6
  Component Side w11.81: U6.19@1900.94,3673.15 1900.94,3697 1903.94,3700 ; 1919.41,3305.59 1919.41,3430.5 U6.8@1919.41,3503 ; U6.8@1920.63,3515.67 U6.8@1920.63,3504 ; U6.8@1919.41,3503 1920.63,3503 U6.8@1920.63,3504 ; U6.8@1919.41,3503 1919.41,3504 U6.8@1920.63,3504
  Component Side w15: 1815,3060 v1(1860,3060) ; 1903.94,3700 v1(2015,3700) ; v1(1906.94,3245) 1906.94,3293.12 1919.41,3305.59 ; 1919.41,3430.5 1959.32,3430.5 1988.82,3460 v1(2000,3460)
  Signal Layer 1 w20: v1(2000,3460) 2014,3460 2025,3471 2025,3509.64 2035,3519.64 2035,3540.36 2015,3560.36 v1(2015,3700)
  Solder Side w15: v1(1860,3060) 1872.82,3060 1965,3152.18 1965,3220 1940,3245 v1(1906.94,3245)
CAN1H: J1.5 U8.7 | length 4527.9
  Component Side w10: U8.7@2888.73,1762.91 2888.73,1737.07 2915.8,1710 v1(2945,1710)
  Signal Layer 2 w20: J1.5@1845.43,3824.09 1845.31,3824.21 1845.31,4065.31 2660.9,4065.31 2669.69,4074.1 2669.69,4114.1 2773.82,4218.23 3198.23,4218.23 3198.23,3583.23 3036.15,3583.23 2945,3492.08 2945,2053.67 3000,1998.67 3000,1939.64 2945,1884.64 v1(2945,1710)
CAN1L: J1.10 U8.6 | length 4593
  Component Side w10: U8.6@2869.05,1762.91 2869.05,1710 2870,1709.05 2868,1707.05 2870,1705.05 v1(2870,1702.81)
  Signal Layer 1 w20: J1.10@1572.8,3935.91 1572.8,3947.8 1699.1,4074.1 2600.31,4074.1 2609.1,4065.31 2660.9,4065.31 2669.69,4074.1 2669.69,4114.69 2773.23,4218.23 3198.23,4218.23 3198.23,3583.23 3036.15,3583.23 2945,3492.08 2945,1955.36 2940,1950.36 2940,1929.64 2945,1924.64 2945,1780.05 2870,1705.05 v1(2870,1702.81)
CAN1RX: "Teensy 3.6.48" U8.4 | length 1284
  Component Side w10: U8.4@2849.36,1877.09 v1(2849.36,1930.64)
  Component Side w15: 2415,1160 2465,1210 v1(2483.5,1210)
  Signal Layer 2 w20: v1(2483.5,1210) 2483.5,1178.5 2500.18,1161.82 2795,1161.82 2795,1876.28 v1(2849.36,1930.64)
CAN1TX: "Teensy 3.6.47" U8.1 | length 1413.7
  Component Side w10: U8.1@2908.42,1877.09 2908.42,1933.42 v1(2915,1940)
  Component Side w15: 2415,1060 2420,1055 v1(2465,1055)
  Signal Layer 1 w20: v1(2465,1055) 2467.5,1057.5 2467.5,1162.5 2792.5,1162.5 2792.5,1867.5 2850.92,1867.5 2915,1931.58 v1(2915,1940)
CAN2H: J1.3 U6.7 U9.7 | length 1117.9
  Component Side w10: U9.7@1192.09,3663.31 1225,3663.31
  Component Side w11.81: 1900.94,3480 U6.7@1900.94,3515.67
  Component Side w14.76: 1225,3663.31 v1(1225,3720)
  Component Side w15: v1(1888,3453) 1888,3467.06 1900.94,3480
  Signal Layer 1 w20: J1.3@1627.32,3824.09 1638.2,3824.09 1825,3637.29 1825,3616.58 1813,3604.58 1813,3552.36 1845,3520.36 1845,3484.17 1876.17,3453 v1(1888,3453)
  Solder Side w15: v1(1225,3720) 1247.02,3720 1275,3747.98 1535.2,3747.98 1540.68,3742.5 1559.32,3742.5 1627.32,3810.5 J1.3@1627.32,3824.09
CAN2H/J1708+: J1.15 U6.6 | length 915.3
  Component Side w11.81: 1865,3431 1865,3488.74 1881.26,3505 U6.6@1881.26,3515.67
  Component Side w15: v1(1825,3420) 1876,3420 1865,3431
  Signal Layer 1 w20: v1(1825,3420) 1917,3420 1937,3400 1975,3438 1975,3489.14 1961,3503.14 1961,3518.64 1960,3519.64 1960,3547 1985,3572 1985,3755.51 2009.02,3779.53 2009.02,3850.35 2094.57,3935.91 J1.15@2118.07,3935.91
CAN2L: J1.4 U6.20 U9.6 | length 922.6
  Component Side w10: U9.6@1192.09,3643.62 1240,3643.62 1245,3648.62 1245,3750 1525,3750 1540,3765 v1(1550,3765)
  Component Side w11.81: v1(1868.76,3747.84) 1881.26,3735.34 U6.20@1881.26,3673.15
  Signal Layer 2 w20: v1(1550,3765) 1677.28,3765 J1.4@1736.38,3824.09 1812.63,3747.84 v1(1868.76,3747.84)
  Signal Layer 1 w20: v1@1868.42,3747.84 v1(1868.76,3747.84)
CAN2L/J1708-: J1.14 U6.1 | length 498.3
  Component Side w11.81: 1841,3705 1841,3633.78 U6.1@1841.89,3633.78
  Component Side w15: v1@1793,3870 1793,3753 1841,3705
  Signal Layer 1 w20: v1(1795,3870) 1797.36,3872.36 1945.47,3872.36 J1.14@2009.02,3935.91
CAN2RX: U9.4 U14.2 | length 1706.6
  Component Side w10: v1(1065,3585) 1065,3611.02 U9.4@1077.91,3623.94
  Component Side w15: v1(2330,3663.31) 2330,3650 2334.41,3645.59 U14.2@2381.89,3645.59
  Solder Side w15: v1(1065,3585) 1065,3696.98 1070,3701.98 1115.16,3701.98 1303.18,3890 1740,3890 1799,3831 1799,3762 1902.59,3658.41 2325.1,3658.41 v1(2330,3663.31)
CAN2TX: U9.1 U14.1 | length 2213.7
  Component Side w10: v1(1028,3764) 1077,3715 U9.1@1077,3682.99
  Component Side w15: v1(2336.3,3705) 2336.3,3690 2355.12,3671.18 U14.1@2381.89,3671.18
  Solder Side w15: v1(1028,3764) 1028,4068 1073,4113 1933,4113 1946,4100 1946,3909 1908,3871 1908,3775 1940.5,3742.5 2283.8,3742.5 2321.3,3705 v1(2336.3,3705)